# Altium PCB PCB.PcbDoc
Units mm, origin at the board's own origin, x right, y up, seen from the top; angles counter-clockwise.
Board outline 65 x 20 mm, 2 copper layers (Top Layer, Bottom Layer); 12 components, 5 nets, 60 pads, 5 vias.
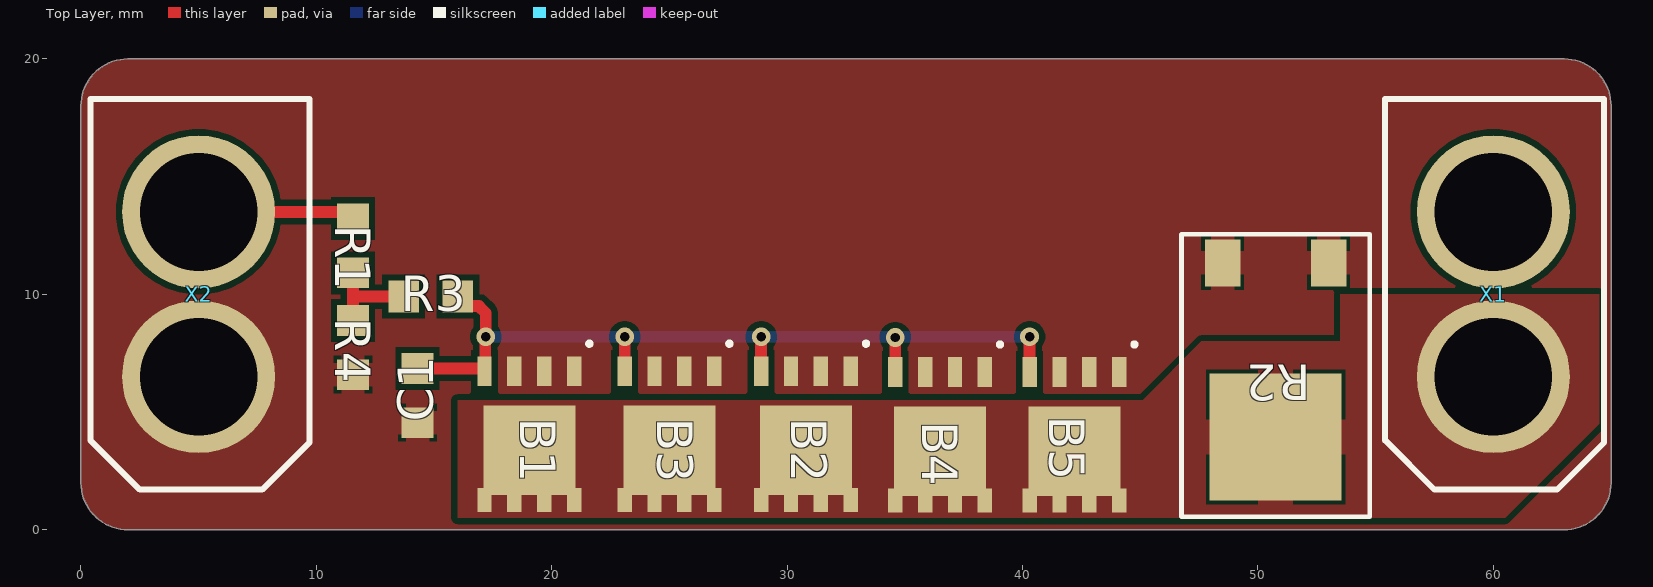
[diagram p0: Top Layer view]
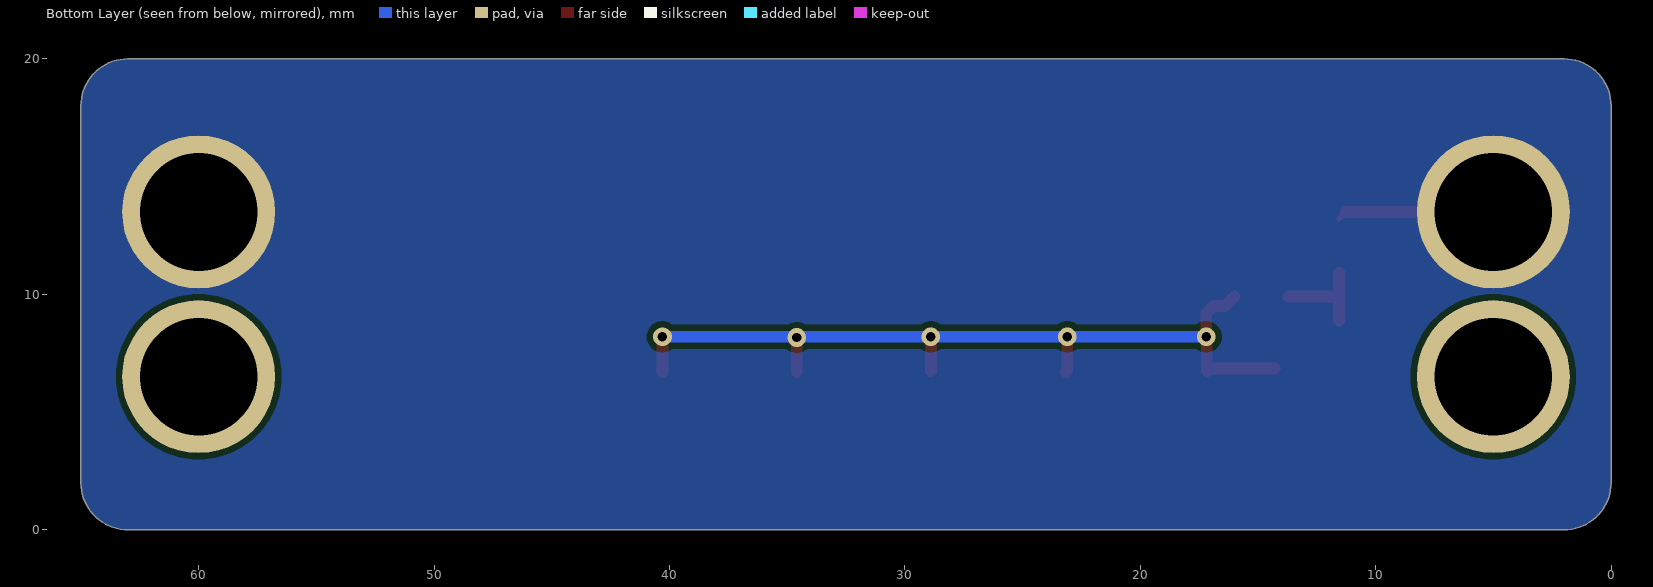
[diagram p1: Bottom Layer view, seen from below]
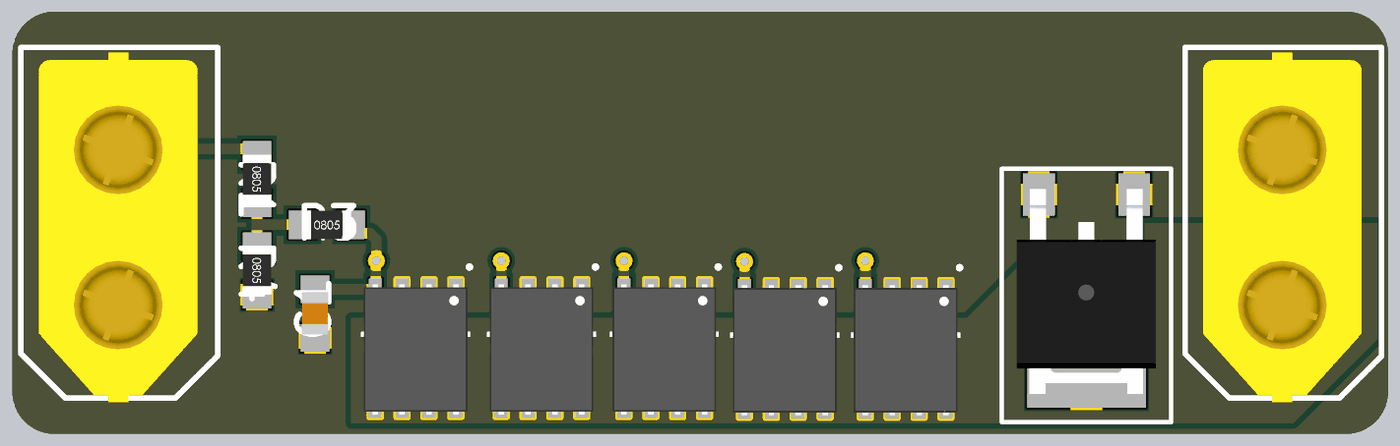
[diagram p2: 3D render of the assembled board from above, using the file's embedded part models]

## Layer stack, top to bottom
Top Solder: solder mask 0.0102, Solder Resist, Dk 3.5
Top Layer: signal copper 0.0356
Dielectric 1: dielectric 0.32, FR-4, Dk 4.8
Bottom Layer: signal copper 0.0356
Bottom Solder: solder mask 0.0102, Solder Resist, Dk 3.5

## Board outline
0,2 0,18 cw(c2,18) 2,20 63,20 cw(c63,18) 65,18 65,2 cw(c63,2) 63,0 2,0 cw(c2,2)

## Design rules (kind name [scope] priority, off if disabled: settings)
Clearance [All] p1: gap=0.254 ignorepadtopadclearanceinfootprint=FALSE except(0: SMDPad-Hole THPad-Hole Via-Hole Fill-Hole Poly-Hole Region-Hole Text-Hole; 0.127: Arc-Arc Arc-Track Track-Track SMDPad-SMDPad; 0.15: Arc-Text Track-Text SMDPad-Text THPad-Text Via-Text Text-Text; 0.2: Arc-SMDPad Arc-THPad Track-SMDPad Track-THPad Fill-Text Poly-Text Region-Text; 0.5: THPad-THPad)
Height [All] p1: minheight=0 maxheight=50 prefheight=12.7
HoleSize [All] p1: absolutevalues=TRUE maxlimit=3.2 minlimit=0.025 maxpercent=80.000 minpercent=20.000
MinimumSolderMaskSliver [OnLayer('Top Layer') vs OnLayer('Top Layer')] p1: minsoldermaskwidth=0.04
PlaneConnect [All] p1: planeconnectstyle=Relief reliefexpansion=0.508 reliefentries=4 reliefconductorwidth=0.3 reliefairgap=0.18
PolygonConnect [All] p1: thpad.connectstyle=Relief thpad.reliefconductorwidth=1.016 thpad.reliefentries=4 thpad.polygonreliefangle="90 Angle" thpad.airgapwidth=0.15 smdpad.connectstyle=Relief smdpad.reliefconductorwidth=1.016 smdpad.reliefentries=4 smdpad.polygonreliefangle="90 Angle" smdpad.airgapwidth=0.15 via.connectstyle=Direct via.reliefconductorwidth=1.016 via.reliefentries=4 via.polygonreliefangle="90 Angle" via.airgapwidth=0.15
RoutingVias [All] p1: holewidth=0.3 width=0.5 viastyle="Through Hole" minholewidth=0.2 minwidth=0.45 maxholewidth=2 maxwidth=3
SilkToSilkClearance [All] p1: silktosilkclearance=0.1
SilkToSolderMaskClearance [IsPad] p1: minsilkscreentomaskgap=0 clearancetoexposedcopper=TRUE
SolderMaskExpansion SolderMaskExpansion_1 [All] p1: expansion=0.102 istentingtop=FALSE
SolderMaskExpansion SolderMaskExpansion_Via [All] p2: expansion=-25 istentingtop=TRUE
Width [All] p1: maxlimit=10 minlimit=0.127 preferedwidth=0.54 minimp=50.000000 maximp=50.000000 favimp=50.000000
24 further rules are at their usual default settings.

## Components (designator, comment, footprint, x,y, rotation, side; value= is the part's Value field where it differs from the comment)
B1 "N Kanal FET" "PowerPak SO-8" 19.05,4 r270 top
B2 "N Kanal FET" "PowerPak SO-8" 30.8,4 r270 top
B3 "N Kanal FET" "PowerPak SO-8" 25,4 r270 top
B4 "N Kanal FET" "PowerPak SO-8" 36.495,3.968 r270 top
B5 "N Kanal FET" "PowerPak SO-8" 42.205,3.968 r270 top
C1 "Capacitor 0805" "CAP CER 0805 H" 14.3,5.7 r90 top value=1uF
R1 "Resistor 0805" "RES 0805 H" 11.557,12.065 r270 top value=22k
R2 "Resistor 2512" "DPAK Schottky" 53,11.337 r180 top value=47R
R3 "Resistor 0805" "RES 0805 H" 14.859,9.906 r0 top value=470k
R4 "Resistor 0805" "RES 0805 H" 11.557,7.74 r270 top value=22k
X1 "XT60" "XT60_THT Male" 60,10 r270 top
X2 "XT60" "XT60_THT Male" 5,10 r270 top

## Footprints (in the part's own frame and the unit in brackets; to place one, negate y for a bottom-side part, rotate by r counter-clockwise, add the part's x,y. Pads: shape width x height; smd on the part's side, far side on the other; paste and mask are expansions set on the pad)
"CAP CER 0805 H" [mm] "0805 ceramic capacitor for hand soldering"
  rect 1.3x1.35 smd: 1(-1.15,0) 2(1.15,0)
  body extent -1,-0.62 1,0.63, height 0.8
"DPAK Schottky" [mm]
  rect 1.5x2 smd: 1(0,0) 1(4.5,0)
  rect 5.6x5.4 smd: 2(2.25,7.4)
  silkscreen extent -1.75,-1.22 6.25,10.78, body extent -1.03,-0.26 5.55,9.44, height 2.3
"PowerPak SO-8" [mm]
  rect 1.27x0.61 smd: 1(-2.732,-1.905) 2(-2.732,1.905) 2(-2.732,-0.635) 2(-2.732,0.635)
  rect 3.81x3.91 smd: 3(0.628,0)
  rect 1.02x0.61 smd: 3(2.733,1.905) 3(2.733,-0.635) 3(2.733,0.635) 3(2.733,-1.905)
  silkscreen extent -3.98,2.47 -3.83,2.62, body extent -3.07,-2.58 3.07,2.58, height 1.12
"RES 0805 H" [mm] "0805 resistor for hand soldering"
  rect 1.3x1.35 smd: 1(-1.15,0) 2(1.15,0)
  body extent -1.15,-0.67 1.15,0.68, height 0.76
"XT60_THT Male" [mm] "XT60 to Board"
  round 6.5 hole 5: 1(-3.5,0) 2(3.5,0)
  silkscreen extent -8.3,-4.6 8.3,4.7, body extent -8.05,-3.75 8.5,3.75, height 16

## Via types
v1: diameter 0.8, hole 0.4, Top Layer to Bottom Layer, 5 vias

## Nets (pads, with @x,y where several pads share a name; then routed paths per layer and width w, separated by ;. In a path a pad name is that pad's centre, name@x,y a point inside that pad or via, vN(x,y) a via of type N, cw(c..) or ccw(c..) an arc to the next point about the centre after c; other vN are vias at no path point)
GND: B1.2 B2.2 B3.2 B4.2 B5.2 C1.1 R2.1 R4.2 X2.2
NetB1_1: B1.1 B2.1 B3.1 B4.1 B5.1 C1.2 R3.2 | length 36
  Top Layer w0.5: C1.2 17.09,6.85 17.145,6.795 B1.1 17.173,6.76 17.173,8.172 v1(17.2,8.2) 17.2,9.207 16.907,9.5 16.409,9.5 16.009,9.9 R3.2 R3.2@16.005,9.902 ; v1(23.1,8.2) 23.1,6.753 B3.1@23.15,6.703 ; B2.1 28.895,8.195 v1(28.9,8.2) ; B4.1 34.592,6.702 34.592,8.165 v1(34.595,8.167) ; B5.1 v1(40.3,8.2)
  Bottom Layer w0.5: v1(17.2,8.2) v1(23.1,8.2) v1(28.9,8.2) v1(40.3,8.2)
NetB1_3: B1.3 B2.3 B3.3 B4.3 B5.3 R2.2 X1.2
NetR1_2: R1.2 R3.1 R4.1 | length 4.2
  Top Layer w0.254: R3.1@13.705,9.902 R3.1
  Top Layer w0.5: R4.1 11.557,9.902 ; R1.2 11.557,9.902 ; R3.1@13.705,9.902 11.557,9.902
VCC: R1.1 X1.1 X2.1 | length 6.7
  Top Layer w0.254: R1.1@11.272,13.5 R1.1
  Top Layer w0.5: X2.1 R1.1@11.272,13.5

## Polygon pours and split planes (outlines as drawn)
GND on Top Layer "NONET_L-01_P-001" (solid, pour order 1): 0,2 0,18 cw(c2,18) 2,20 63,20 cw(c63,18) 65,18 65,2 cw(c63,2) 63,0 2,0 cw(c2,2)
NetB1_3 on Top Layer "NONET_L-01_P-001" (solid, pour order 0): 16,5.5 16,0.5 60.5,0.5 64.5,4.5 64.5,10 53.5,10 53.5,8 47.6,8 45.1,5.5
VCC on Bottom Layer "NONET_L-01_P-001" (solid, pour order 3): 0,2 0,18 cw(c2,18) 2,20 63,20 cw(c63,18) 65,18 65,2 cw(c63,2) 63,0 2,0 cw(c2,2)

## Silkscreen, mask and mechanical layers (free items; w line width, h text height)
Mechanical 1:
  the board outline again, w0.127